# Allegro board LEXICON_GLOVE.brd
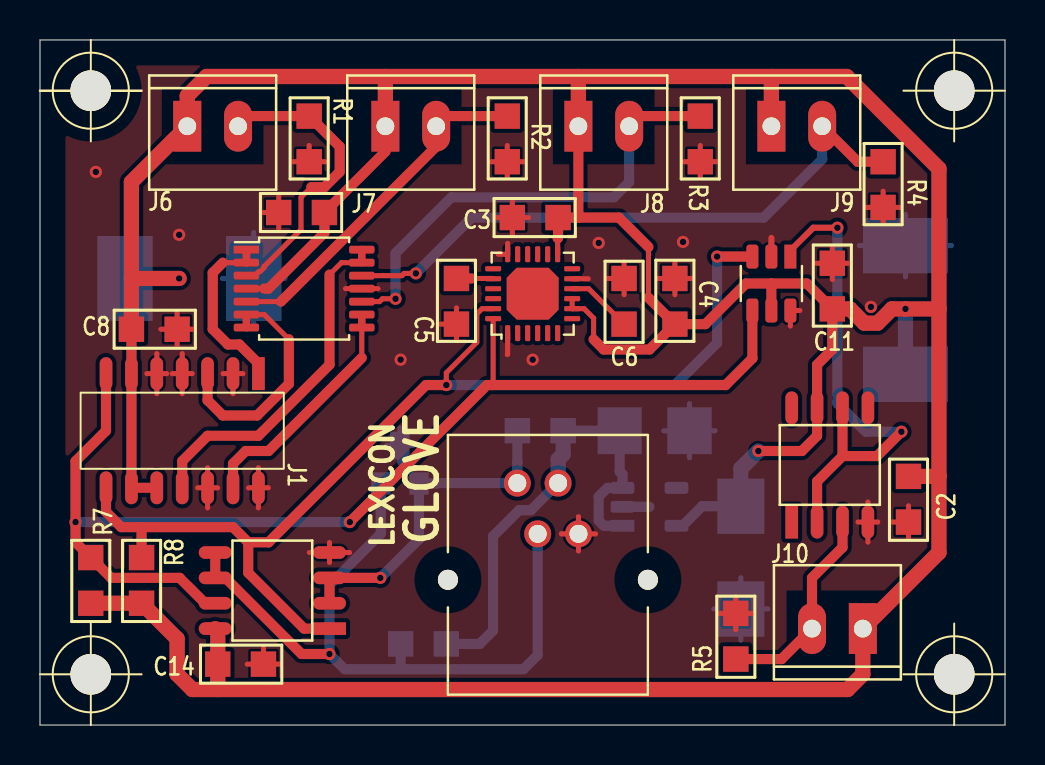
[diagram p0: board, top side]
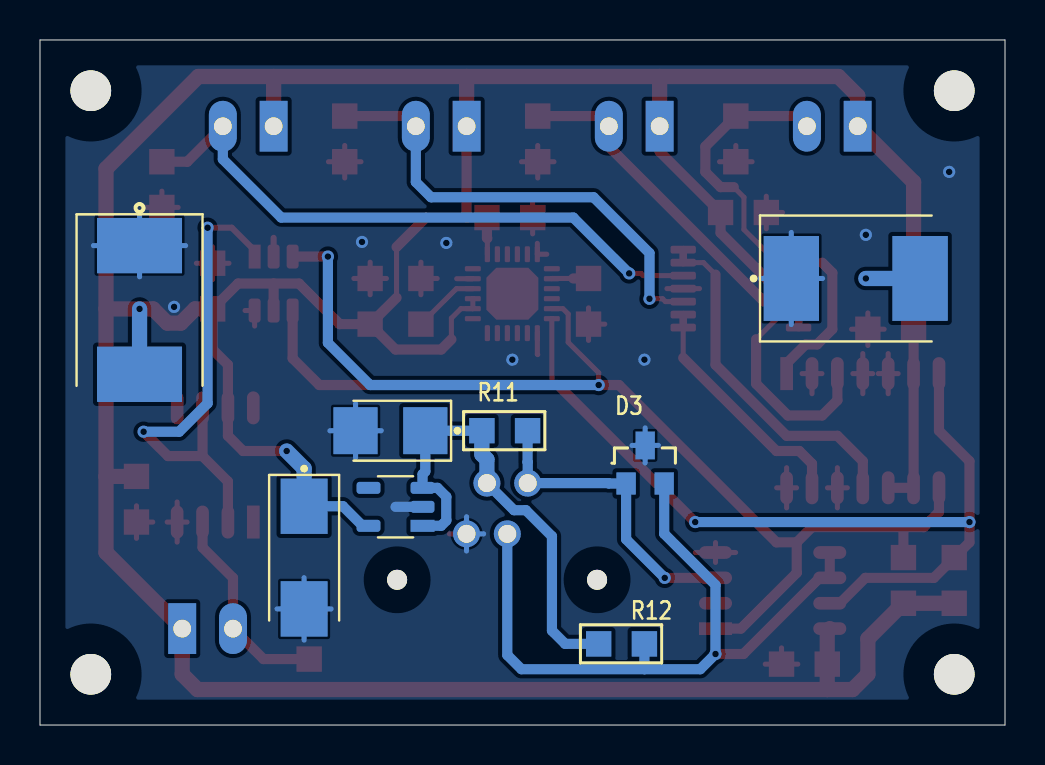
[diagram p1: board, bottom side, seen from below]

Outline 48.26 x 34.29 mm; copper layers: TOP, BOTTOM. Coordinates in mm from the lower left corner of the outline.
Outline path: 0,34.29 48.26,34.29 48.26,0 0,0 0,34.29

## Design rules (mm)
constraint set DEFAULT: min track width 0.254

## Placement (name value [footprint] x y rotation side)
C1  100n  [GU-R0805]  11.94 25.65 0 top
C2  100n  [GU-R0805]  43.43 10.16 90 top
C3  100n  [GU-R0805]  23.62 25.4 0 top
C4  10n  [GU-R0805]  31.75 22.35 270 top
C5  2n2  [GU-R0805]  20.83 22.35 270 top
C6  100n  [GU-R0805]  29.21 20.07 90 top
C8  100n  [GU-R0805]  6.86 19.81 180 top
C9  10u  [GU-C2917]  7.47 22.35 180 bottom
C10  10u  [GU-C2917]  43.28 20.78 270 bottom
C11  100n  [GU-R0805]  39.62 23.11 270 top
C12  1u  [GU-C1411]  30.73 14.73 0 bottom
C13  4u7  [GU-C2312]  35.05 8.38 270 bottom
C14  100n  [GU-R0805]  11.18 3.05 180 top
D3  BAT54A/SOT  [GU-SOT23]  18.95 12.09 180 bottom
J1  MCP3428  [GU-SOIC14]  7.11 14.73 270 top
J3  MCP3421  [SOT23-6P95_280X145L45X37]  36.58 22.1 180 top
J5  MPU-6050  [QFN25P50_400X400X95L35X24T260]  24.64 21.59 0 top
J6  F1  [GU-MOLEX2]  7.37 29.97 90 top
J7  F2  [GU-MOLEX2]  17.27 29.97 90 top
J8  F3  [GU-MOLEX2]  26.92 29.97 90 top
J9  F4  [GU-MOLEX2]  36.58 29.97 90 top
J10  F5  [GU-MOLEX2]  41.15 4.83 270 top
J13  P82B96TD  [GU-SOIC8]  14.48 4.83 180 top
J14  PI  [WURTH_615004143821]  25.4 1.27 0 top
J15  ADP121-AUJZ33R7  [SOT23-5P95_280X145L45X37]  30.48 10.92 90 bottom
NOREF  -  [unnamed]  45.72 2.54 0 top
NOREF#2  -  [unnamed]  45.72 31.75 0 top
NOREF#3  -  [unnamed]  2.54 2.54 0 top
NOREF#4  -  [unnamed]  2.54 31.75 0 top
R1  33k  [GU-R0805]  13.46 30.48 270 top
R2  33k  [GU-R0805]  23.37 30.48 270 top
R3  33k  [GU-R0805]  33.02 30.48 270 top
R4  33k  [GU-R0805]  42.16 28.19 270 top
R5  33k  [GU-R0805]  34.8 3.3 90 top
R7  2k2  [GU-R0805]  2.54 6.1 90 top
R8  2k2  [GU-R0805]  5.08 6.1 90 top
R11  330R  [GU-R0805]  26.16 14.73 180 bottom
R12  330R  [GU-R0805]  20.32 4.06 180 bottom
U1  TL074  [SOP14P65_500X640X120L60X24]  13.21 21.84 270 top
U2  TL071  [GU-SOIC8]  37.59 10.16 90 top

## Library data of the parts
C1-C6 C8-C11 C14 = CAP NP
C12 C13 = C
D3 = BAT54A/SOT
J1 = CON14C
J3 = CON6AP_0
J5 = CON24C_2
J6-J10 = CON2
J13 = CON8B_1
J14 = CON4
J15 = CON5_2
R1-R5 R7 R8 R11 R12 = RESISTOR
U1 = TL074
U2 = TL071_1

## Footprints (pads in the part's own frame, mm; a bottom-side part is the same pattern mirrored in y, then rotated)
GU-C1411
  rect 2.21x2.35 smd: 1(-1.745,0) 2(1.745,0)
GU-C2312
  rect 2.77x2.35 smd: 1(-2.57,0) 2(2.57,0)
GU-C2917
  rect 2.77x4.25 smd: 1(-3.22,0) 2(3.22,0)
GU-MOLEX2
  rect 2.54x1.397 hole 0.889: 1(0,0)
  oval 2.54x1.397 hole 0.889: 2(0,-2.54)
GU-R0805
  rect 1.27x1.27 smd: 1(0,0) 2(2.286,0)
GU-SOIC8
  rect 1.651x0.635 smd: 1(0,0)
  oval 1.651x0.635 smd: 2(0,-1.27) 3(0,-2.54) 4(0,-3.81) 5(5.715,-3.81) 6(5.715,-2.54) 7(5.715,-1.27) 8(5.715,0)
GU-SOIC14
  rect 1.651x0.635 smd: 1(-2.857,3.81)
  oval 1.651x0.635 smd: 2(-2.857,2.54) 3(-2.857,1.27) 4(-2.857,0) 5(-2.857,-1.27) 6(-2.857,-2.54) 7(-2.857,-3.81) 8(2.857,-3.81) 9(2.857,-2.54) 10(2.857,-1.27) 11(2.857,0) 12(2.857,1.27) 13(2.857,2.54) 14(2.857,3.81)
GU-SOT23
  rect 0.965x1.118 smd: 1(0,0) 2(1.905,0)
  rect 0.965x1.397 smd: 3(0.953,1.905)
QFN25P50_400X400X95L35X24T260
  rrect 0.26x0.8 smd: 1(-1.25,-1.975) 2(-0.75,-1.975) 3(-0.25,-1.975) 4(0.25,-1.975) 5(0.75,-1.975) 6(1.25,-1.975) 13(1.25,1.975) 14(0.75,1.975) 15(0.25,1.975) 16(-0.25,1.975) 17(-0.75,1.975) 18(-1.25,1.975)
  rrect 0.8x0.26 smd: 7(1.975,-1.25) 8(1.975,-0.75) 9(1.975,-0.25) 10(1.975,0.25) 11(1.975,0.75) 12(1.975,1.25) 19(-1.975,1.25) 20(-1.975,0.75) 21(-1.975,0.25) 22(-1.975,-0.25) 23(-1.975,-0.75) 24(-1.975,-1.25)
  rrect 2.6x2.6 smd: 25(0,0)
SOP14P65_500X640X120L60X24
  rect 0.39x1.27 smd: 1(-1.95,-2.885)
  rrect 0.39x1.27 smd: 2(-1.3,-2.885) 3(-0.65,-2.885) 4(0,-2.885) 5(0.65,-2.885) 6(1.3,-2.885) 7(1.95,-2.885) 8(1.95,2.885) 9(1.3,2.885) 10(0.65,2.885) 11(0,2.885) 12(-0.65,2.885) 13(-1.3,2.885) 14(-1.95,2.885)
SOT23-5P95_280X145L45X37
  rect 0.6x1.2 smd: 1(-0.95,-1.35)
  rrect 0.6x1.2 smd: 2(0,-1.35) 3(0.95,-1.35) 4(0.95,1.35) 5(-0.95,1.35)
SOT23-6P95_280X145L45X37
  rect 0.6x1.2 smd: 1(-0.95,-1.35)
  rrect 0.6x1.2 smd: 2(0,-1.35) 3(0.95,-1.35) 4(0.95,1.35) 5(0,1.35) 6(-0.95,1.35)
unnamed
  round 2.032 hole 3.962 unplated: (0,0)
WURTH_615004143821
  round 1 hole 2.4 unplated: (-5,6) (5,6)
  round 1.35 hole 0.9: 1(1.53,8.3) 2(0.51,10.84) 3(-0.51,8.3) 4(-1.53,10.84)

## Nets
3V3: C1.2 C2.2 C3.2 C4.2 C8.2 C9.2 C10.2 C11.2 C13.1 C14.2 J1.6 J1.9 J1.10 J3.5 J5.8 J5.9 J5.13 J6.1 J7.1 J8.1 J9.1 J10.1 J13.8 J15.5(VOUT) R7.1 R8.1 U1.4 U2.7
5V: C12.1 J14.2 J15.1 J15.3 R11.1 R12.1
GND: C1.1 C2.1 C3.1 C4.1 C5.2 C6.2 C8.1 C9.1 C10.1 C11.1 C12.2 C13.2 C14.1 D3.3 J1.2 J1.4 J1.5 J1.12 J1.14 J3.2 J3.6 J5.1 J5.11 J5.18 J13.4 J14.1 J15.2 R1.2 R2.2 R3.2 R4.2 R5.2 U1.11 U2.4(V-)
FING1: J1.1 U1.1 U1.2
FING2: J1.3 U1.6 U1.7
FING3: J1.13 U1.8 U1.9
FING4: J1.11 U1.13 U1.14(OUT)
FING5: J3.1 U2.2 U2.6
SCL: J1.8 J3.3 J5.23 J13.1 R8.2
SCL_5V: D3.1 J13.2 J13.3 J14.4 R11.2
SDA: J1.7 J3.4 J5.24 J13.7 R7.2
SDA_5V: D3.2 J13.5 J13.6 J14.3 R12.2
N00544: J6.2 R1.1 U1.3
N00572: J7.2 R2.1 U1.5
N00597: J8.2 R3.1 U1.10
N00622: J9.2 R4.1 U1.12
N00734: J10.2 R5.1 U2.3
N22542: C5.1 J5.20
N22672: C6.1 J5.10

Pads without a net: J5 2 3 4 5 6 7 12 14 15 16 17 19 21 22 25; J15 4; U2 1 5 8

## Via types
v1: diameter 0.61, hole 0.33, TOP to BOTTOM, 20 vias

## Routing (per net, layer and track width the routed paths; a pad name or vN(x,y) marks a point on that pad's centre or on a via; arc(x,y) is an arc through that point)
3V3: length 219.5
  TOP w0.254: J5.13 25.89,24.36 ; 30.43,21.39 30.43,23.93 ; 27.69,19.3 27.69,20.36 27.21,20.84 J5.8 J5.9 ; 11.21,21.84 U1.4
  TOP w0.508: 26.92,25.4 J8.1 ; 26.92,25.4 C3.2 25.91,24.38 25.89,24.36 ; 26.92,25.4 28.96,25.4 30.43,23.93 ; J7.1 17.27,28.7 C1.2 14.22,24.64 11.43,21.84 11.21,21.84 ; v1(35.92,13.72) 38.1,13.72 38.86,14.48 U2.7 38.86,18.03 39.62,18.8 C11.2 38.35,22.1 36.58,22.1 ; C4.2 30.48,18.8 28.19,18.8 27.69,19.3 ; C4.2 33.27,20.07 35.31,22.1 36.58,22.1 ; C4.2 30.43,21.39 ; C8.2 J1.6 J1.9 J1.10 ; 36.58,22.1 J3.5
  TOP w0.762: 8.89,1.78 40.39,1.78 41.15,2.54 J10.1 44.96,8.64 44.96,12.45 ; 8.89,1.78 7.62,1.78 6.86,2.54 6.86,4.32 R8.1 R7.1 ; 8.89,1.78 C14.2 8.89,4.7 J13.8 ; J7.1 17.27,32.46 ; 17.27,32.46 8.33,32.46 7.37,31.5 J6.1 4.57,27.18 4.57,22.35 ; 17.27,32.46 26.92,32.46 ; J8.1 26.92,32.46 ; 26.92,32.46 36.58,32.46 ; C8.2 4.57,22.35 ; 4.57,22.35 v1(6.96,22.35) ; 44.96,20.83 v1(43.28,20.83) 42.6,20.83 41.89,20.12 41.22,20.12 40.51,20.83 C11.2 ; 44.96,20.83 44.96,27.84 40.34,32.46 36.58,32.46 ; 44.96,20.83 44.96,12.45 ; 44.96,12.45 C2.2 ; 36.58,32.46 J9.1
  BOTTOM w0.508: C13.1 33.11,10.95 32.13,9.97 J15.5
  BOTTOM w0.762: v1(35.92,13.72) 35.05,12.85 C13.1 ; C10.2 v1(43.28,20.83) ; C9.2 v1(6.96,22.35)
5V: length 24
  BOTTOM w0.508: J15.1 28.2,9.97 27.94,10.23 27.94,11.43 28.38,11.87 J15.3 29.13,12.55 28.99,12.69 C12.1 R11.1 ; R12.1 22,4.06 22.66,4.72 22.66,9.45 23.96,10.75 24.55,10.75 J14.2
  BOTTOM w0.762: J14.2 25.91,13.29 26.16,13.55 R11.1
GND: length 104.4
  TOP w0.254: 5.84,16.59 J1.5 ; J1.5 5.84,18.59 ; J1.5 5.35,17.59 ; J1.5 6.34,17.59 ; R5.2 34.8,6.4 ; R5.2 33.98,5.59 ; R5.2 34.8,4.77 ; R5.2 35.61,5.59 ; C2.1 43.43,10.97 ; C2.1 42.62,10.16 ; C2.1 43.43,9.35 ; C3.1 23.62,26.21 ; C3.1 24.44,25.4 ; C3.1 22.81,25.4 ; C3.1 23.62,24.59 ; 38.81,23.11 C11.1 ; C11.1 39.62,23.93 ; C11.1 40.44,23.11 ; C11.1 39.62,22.3 ; C8.1 6.86,20.63 ; C8.1 7.67,19.81 ; C8.1 6.04,19.81 ; C8.1 6.86,19 ; 11.94,24.84 C1.1 ; C1.1 11.12,25.65 ; C1.1 11.94,26.47 ; C14.1 11.99,3.05 ; C14.1 11.18,3.86 ; C14.1 10.36,3.05 ; 20.01,20.07 C5.2 ; C5.2 20.83,19.25 ; C5.2 20.83,20.88 ; C6.2 29.21,23.17 ; C6.2 29.21,21.54 ; C6.2 28.4,22.35 ; R2.2 23.37,29.01 ; R2.2 24.18,28.19 ; R2.2 22.55,28.19 ; R2.2 23.37,27.38 ; C4.1 32.56,22.35 ; C4.1 30.94,22.35 ; C4.1 31.75,23.17 ; C4.1 31.75,21.54 ; R3.2 33.83,28.19 ; R3.2 33.02,29.01 ; R3.2 32.21,28.19 ; R3.2 33.02,27.38 ; 40.91,10.16 U2.4 ; U2.4 41.9,10.16 ; U2.4 41.4,11.16 ; U2.4 41.4,9.16 ; 10.43,11.87 J1.14 ; J1.14 10.92,12.88 ; J1.14 10.92,10.87 ; J1.14 11.42,11.87 ; 16.91,21.84 U1.11 15.28,21.84 ; J1.2 10.15,17.59 ; J1.2 9.16,17.59 ; J1.2 9.65,16.59 ; J13.4 15.48,8.64 ; J13.4 13.47,8.64 ; J13.4 14.48,8.14 ; J13.4 14.48,9.13 ; J14.1 26.93,10.42 ; J14.1 27.78,9.57 ; J14.1 26.93,8.72 ; J14.1 26.08,9.57 ; 23.37,18.54 23.39,18.56 J5.1 ; J1.12 8.38,12.88 ; J1.12 8.88,11.87 ; J1.12 7.89,11.87 ; J1.12 8.38,10.87 ; 38,20.75 J3.6 37.53,19.97 ; J5.11 27.42,22.34 ; 7.11,16.59 J1.4 ; J1.4 7.11,18.59 ; J1.4 6.62,17.59 ; J1.4 7.61,17.59 ; R4.2 42.98,25.91 ; R4.2 41.35,25.91 ; R4.2 42.16,25.09 ; R4.2 42.16,26.72 ; 12.65,28.19 R1.2 ; R1.2 14.28,28.19 ; R1.2 13.46,29.01 ; 23.39,24.11 J5.18 22.92,23.57
  TOP w0.305: J3.2 36.58,24.38
  BOTTOM w0.254: 43.28,22.43 C10.1 ; C10.1 43.28,25.56 ; C10.1 40.98,24 ; C10.1 45.58,24 ; C13.2 35.05,7.38 ; C13.2 36.41,5.81 ; C13.2 35.05,4.25 ; C13.2 33.7,5.81 ; D3.3 18,14.87 ; D3.3 18,13.12 ; D3.3 17.33,14 ; D3.3 18.66,14 ; C12.2 33.76,14.73 ; C12.2 32.48,16.09 ; C12.2 32.48,13.38 ; C12.2 31.2,14.73 ; 26.93,8.72 J14.1 ; J14.1 26.08,9.57 ; J14.1 26.93,10.42 ; 9.12,22.35 C9.1 ; C9.1 12.25,22.35 ; C9.1 10.69,20.05 ; C9.1 10.69,24.66
  BOTTOM w0.508: J15.2 30.48,10.92
  vias: v1(2.79,27.69) v1(6.96,24.54) v1(18.03,18.29) v1(24.64,18.29) v1(27.94,24.13) v1(32.16,24.18) v1(41.55,20.93)
FING1: length 8.9
  TOP w0.254: U1.2 9.14,23.14
  TOP w0.381: U1.2 U1.1
  TOP w0.508: 9.14,23.14 8.64,22.64 8.64,19.81 9.4,19.05 9.97,19.05 10.92,18.1 J1.1
FING2: length 11.9
  TOP w0.254: 12.45,19.31 11.21,20.54 U1.6
  TOP w0.381: U1.7 U1.6
  TOP w0.508: J1.3 8.38,16.26 9.14,15.49 10.86,15.49 12.45,17.08 12.45,19.31
FING3: length 12
  TOP w0.254: U1.8 16.09,18.38
  TOP w0.381: U1.8 U1.9
  TOP w0.508: 16.09,18.38 11.43,13.72 10.29,13.72 9.65,13.08 J1.13
FING4: length 17.7
  TOP w0.254: U1.13 15.08,23.14 14.48,22.54
  TOP w0.381: U1.13 U1.14
  TOP w0.508: J1.11 7.11,13.21 8.38,14.48 10.92,14.48 14.48,18.03 14.48,22.54
FING5: length 25.4
  TOP w0.305: v1(39.88,24.89) 38.67,24.89 37.53,23.75 J3.1
  TOP w0.508: v1(43.08,14.68) 41.86,13.46 40.13,13.46 ; U2.6 40.13,13.46 ; 40.13,13.46 38.86,12.19 U2.2
  BOTTOM w0.508: v1(39.88,24.89) 39.88,16.1 41.3,14.68 v1(43.08,14.68)
SCL: length 56
  TOP w0.254: v1(20.32,17.02) 20.32,17.63 21.84,19.16 21.84,20.57 22.11,20.84 J5.23
  TOP w0.508: J3.3 v1(33.86,23.45) ; 10.41,9.14 11.43,9.14 19.3,17.02 v1(20.32,17.02) ; 10.41,9.14 9.65,9.91 5.08,9.91 ; 10.41,9.14 10.41,7.62 13.21,4.83 J13.1 ; 5.08,9.91 4.06,9.91 3.3,10.67 J1.8 ; 5.08,9.91 R8.2
  BOTTOM w0.508: v1(33.86,23.45) 33.86,19.13 31.75,17.02 v1(20.32,17.02)
SCL_5V: length 16.9
  TOP w0.508: J13.2 J13.3 v1(17.02,7.37)
  BOTTOM w0.508: R11.2 23.88,13.17 23.87,13.17 J14.4 19.83,12.11 19.81,12.09 D3.1 18.95,9.3 v1(17.02,7.37)
SDA: length 60.3
  TOP w0.254: J5.24 22.66,17.05 22.63,17.02
  TOP w0.508: J1.7 3.3,14.73 1.78,13.21 v1(1.78,10.16) 1.78,9.14 R7.2 3.56,7.37 6.98,7.37 8.25,6.1 J13.7 ; v1(15.49,10.16) 22.35,17.02 34.29,17.02 35.63,18.35 J3.4
  BOTTOM w0.508: v1(15.49,10.16) v1(1.78,10.16)
SDA_5V: length 36.5
  TOP w0.508: J13.5 J13.6 9.27,7.37 13.08,3.56 v1(14.48,3.56)
  BOTTOM w0.508: 18.03,2.79 R12.2 ; 18.03,2.79 15.24,2.79 v1(14.48,3.56) 14.48,7.01 17.04,9.58 D3.2 ; 18.03,2.79 24.18,2.79 24.89,3.5 J14.3
N00544: length 15.1
  TOP w0.254: 13.56,26.92 13.06,26.42 13.06,24.8 11.21,22.96 11.21,22.9 11,22.69 10.95,22.69 10.75,22.49 U1.3
  TOP w0.508: 13.56,26.92 14.22,26.92 14.99,27.69 14.99,28.96 R1.1 ; J6.2 10.41,30.48 R1.1 ; R1.1 13.35,30.59
N00572: length 17.5
  TOP w0.254: 12.05,21.19 U1.5
  TOP w0.508: R2.1 20.32,30.48 J7.2 19.81,28.96 12.05,21.19
N00597: length 23.7
  TOP w0.254: U1.10 16.98,21.19 17.12,21.34 v1(17.78,21.34)
  TOP w0.508: J8.2 29.97,30.48 R3.1
  BOTTOM w0.508: v1(17.78,21.34) 17.78,23.62 20.57,26.42 28.7,26.42 29.46,27.18 J8.2
N00622: length 30.9
  TOP w0.254: U1.12 18.1,22.49 18.21,22.61 v1(18.8,22.61)
  TOP w0.508: R4.1 40.89,28.19 J9.2
  BOTTOM w0.508: J9.2 39.12,28.32 36.2,25.4 21.59,25.4 v1(18.8,22.61)
N00734: length 10.4
  TOP w0.508: U2.3 40.13,8.89 38.61,7.37 J10.2 37.08,3.3 R5.1
N22542: length 1.8
  TOP w0.254: 21.59,22.35 22.65,22.35 J5.20
  TOP w0.508: 21.59,22.35 C5.1
N22672: length 3.3
  TOP w0.254: C6.1 27.44,21.84 J5.10

## Copper pours and planes (outline as drawn; the poured copper is in the pictures)
GND on TOP: 1.27,33.02 46.99,33.02 46.99,1.27 1.27,1.27 ; 12 cut-outs
GND on BOTTOM: 1.27,33.02 46.99,33.02 46.99,1.27 1.27,1.27 ; 2 cut-outs

## Text on the board
Ref Des/Silkscreen Top: LEXICON | GLOVE
